# Altium PCB Fingerboardv4.PcbDoc
Units mil, origin at the board's own origin, x right, y up, seen from the top; angles counter-clockwise.
Board outline 600 x 900 mil, 2 copper layers (Top Layer, Bottom Layer); 12 components, 14 nets, 70 pads, 17 vias.
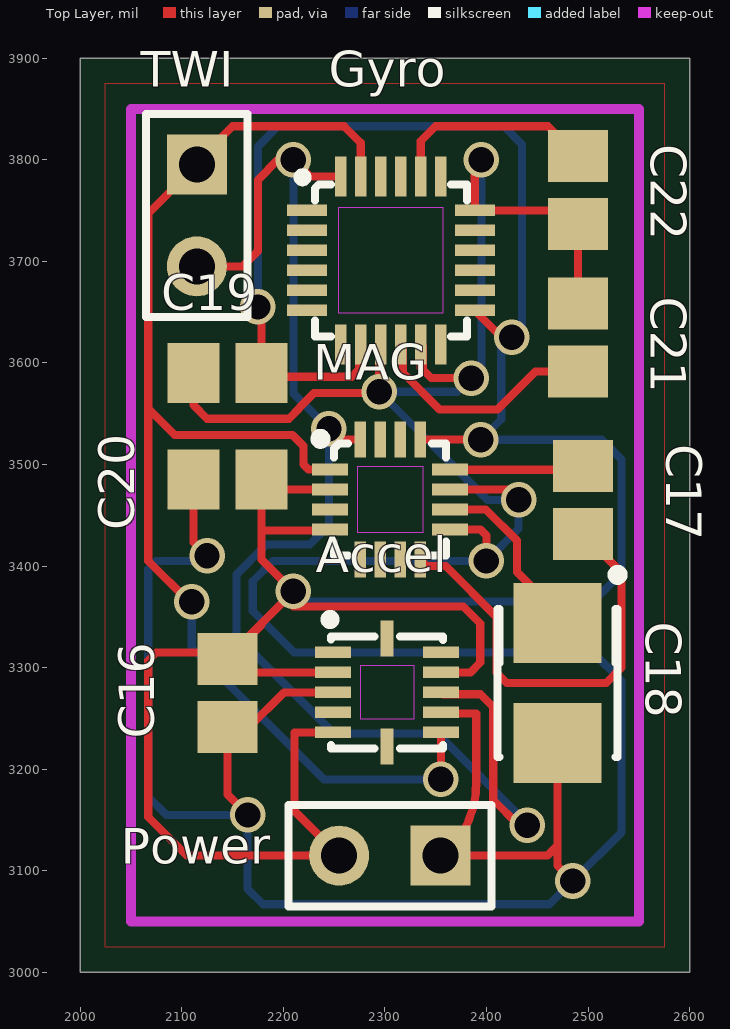
[diagram p0: Top Layer view]
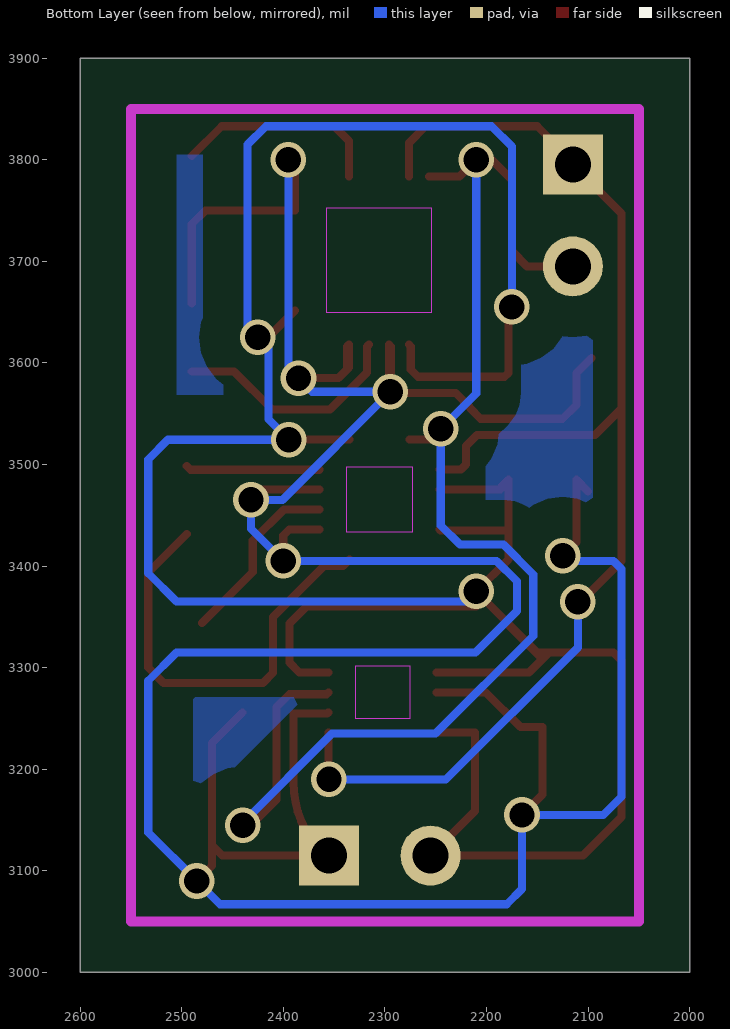
[diagram p1: Bottom Layer view, seen from below]

## Layer stack, top to bottom
Top Layer: signal copper 1.4
Dielectric: dielectric 12.6, FR-4, Dk 4.8
Bottom Layer: signal copper 1.4

## Board outline
2000,3000 2600,3000 2600,3900 2000,3900

## Design rules (kind name [scope] priority, off if disabled: settings)
Clearance "Polygon Clearance" [InPolygon] p1: gap=40
Clearance [All] p2: gap=8.1
HoleSize [All] p1: absolutevalues=TRUE maxlimit=100 minlimit=24 maxpercent=80.000 minpercent=20.000
PolygonConnect [All] p1: connectstyle=Relief reliefconductorwidth=10 reliefentries=4 polygonreliefangle="90 Angle"
RoutingVias [All] p1: holewidth=25 width=35 viastyle="Through Hole" minholewidth=25 minwidth=35 maxholewidth=25 maxwidth=35
SilkscreenOverComponentPads [All] p1: minsilkscreentomaskgap=10
SolderMaskExpansion [All] p1: expansion=4
Width [All] p1: maxlimit=50 minlimit=8 preferedwidth=8
26 further rules are at their usual default settings.

## Classes and differential pairs
net class TWI[1..0]: TWI0 TWI1
net class AUX_TWI[1..0]: AUX_TWI0 AUX_TWI1
component class U_IMU3000: C19 C20 C21 C22 Gyro
component class U_HMC5883L: C17 C18 MAG
component class U_BMA180: Accel C16
component class Fingerboard: Power TWI

## Components (designator, comment, footprint, x,y, rotation, side; value= is the part's Value field where it differs from the comment)
Accel "BMA180" "BMA180 - ECESHOP" 2255,3315 r270 top
C16 "Cap Semi" CAPC2012N 2145,3275 r90 top
C17 "Cap Semi" CAPC2012N 2495,3465 r90 top
C18 "Cap Pol1" TC3528-1411 2470,3285 r270 top
C19 "Cap Semi" CAPC2012N 2145,3590 r0 top
C20 "Cap Semi" CAPC2012N 2145,3485 r0 top
C21 "Cap Semi" CAPC2012N 2490,3625 r270 top
C22 "Cap Semi" CAPC2012N 2490,3770 r90 top
Gyro "IMU3000" "IMU3000 - ECESHOP" 2235,3750 r0 top
MAG "HMC5883L" "HMC5883L - ECESHOP" 2255,3495 r0 top
Power "Header 2" HDR1X2 2355,3115 r180 top
TWI "TWI" HDR1X2 2115,3795 r270 top

## Footprints (in the part's own frame and the unit in brackets; to place one, negate y for a bottom-side part, rotate by r counter-clockwise, add the part's x,y. Pads: shape width x height; smd on the part's side, far side on the other; paste and mask are expansions set on the pad)
"BMA180 - ECESHOP" [mm] "BMA180 - ECESHOP"
  rect 0.29x0.9 smd: 1(0,-0.15) 2(0.5,-0.15) 3(1,-0.15) 4(1.5,-0.15) 5(2,-0.15) 7(2,2.55) 8(1.5,2.55) 9(1,2.55) 10(0.5,2.55) 11(0,2.55)
  rect 0.9x0.32 smd: 6(2.35,1.2) 12(-0.35,1.2)
  Keep-Out Layer region: 0.328,0.524 1.658,0.524 1.658,1.876 0.328,1.876
  silkscreen extent -0.91,-0.31 2.4,2.6
CAPC2012N [mm] "Chip Capacitor, Body 2.0x1.3mm, IPC Medium Density"
  rect 1.3x1.5 smd: 1(-0.85,0) 2(0.85,0)
  body extent -1.1,-0.72 1.1,0.72, height 1.1
HDR1X2 [mm] "Connector; Header; 2 Position"
  rect 1.5x1.5 hole 0.9: 1(0,0)
  round 1.5 hole 0.9: 2(2.54,0)
  silkscreen extent -1.27,-1.27 3.81,1.27
"HMC5883L - ECESHOP" [mm]
  rect 0.9x0.29 smd: 1(-0.225,0) 2(-0.225,-0.5) 3(-0.225,-1) 4(-0.225,-1.5) 9(2.775,-1.5) 10(2.775,-1) 11(2.775,-0.5) 12(2.775,0)
  rect 0.29x0.9 smd: 5(0.525,-2.25) 6(1.025,-2.25) 7(1.525,-2.25) 8(2.025,-2.25) 13(2.025,0.75) 14(1.525,0.75) 15(1.025,0.75) 16(0.525,0.75)
  Keep-Out Layer region: 0.452,-1.572 2.099,-1.572 2.099,0.075 0.452,0.075
  silkscreen extent -0.57,-2.15 2.67,0.87
"IMU3000 - ECESHOP" [mm]
  rect 1x0.29 smd: 1(-0.3,0) 2(-0.3,-0.5) 3(-0.3,-1) 4(-0.3,-1.5) 5(-0.3,-2) 6(-0.3,-2.5) 13(3.9,-2.5) 14(3.9,-2) 15(3.9,-1.5) 16(3.9,-1) 17(3.9,-0.5) 18(3.9,0)
  rect 0.29x1 smd: 7(0.55,-3.35) 8(1.05,-3.35) 9(1.55,-3.35) 10(2.05,-3.35) 11(2.55,-3.35) 12(3.05,-3.35) 19(3.05,0.85) 20(2.55,0.85) 21(2.05,0.85) 22(1.55,0.85) 23(1.05,0.85) 24(0.55,0.85)
  Keep-Out Layer region: 0.488,-2.562 3.109,-2.562 3.109,0.066 0.488,0.066
  silkscreen extent -0.48,-3.15 3.7,0.9
TC3528-1411 [mm] "Capacitor, SM Tantalum; Body 3.5 x 2.8 mm (LxW typ)"
  rect 2x2.2 smd: 1(-1.5,0) 2(1.5,0)
  silkscreen extent -2.82,-1.5 1.85,1.63

## Part data
C16 C17 C19 C20 C21 C22: "Capacitor (Semiconductor SIM Model)"
C18: "Polarized Capacitor (Radial)"
Power: "Header, 2-Pin"
TWI: library part "Header 2", "Header, 2-Pin"

## Via types
v1: diameter 35, hole 25, Top Layer to Bottom Layer, 17 vias

## Nets (pads, with @x,y where several pads share a name; then routed paths per layer and width w, separated by ;. In a path a pad name is that pad's centre, name@x,y a point inside that pad or via, vN(x,y) a via of type N, cw(c..) or ccw(c..) an arc to the next point about the centre after c; other vN are vias at no path point)
3.3VCC: Accel.2 Accel.5 Accel.10 C16.2 C19.2 C20.2 Gyro.8 Gyro.13 MAG.2 MAG.4 MAG.13 Power.2 | length 3043.4
  Top Layer w8: v1(2175,3655) 2178.46,3655 C19.2 2182.14,3586.33 2267.37,3586.33 2274.46,3593.41 2274.46,3616.23 Gyro.8 ; 2178.46,3341.93 C16.2 ; Power.2@2235,3115 2105,3115 2067.1,3152.9 2067.1,3307.1 2075,3315 C16.2@2138.46,3315 ; MAG.4 2245.2,3435 2178.46,3435 ; MAG.2 2186.27,3475.32 2186.27,3477.19 C20.2 2178.46,3435 ; Accel.5 2211.26,3236.26 2211.26,3158.74 Power.2 ; Accel.2 2158.15,3295.32 C16.2 ; MAG.13 2394.35,3524.53 v1(2394.52,3524.36) ; Accel.10 2384.22,3295.32 2393.9,3305 2393.9,3343.33 2377.23,3360 2210,3360 v1(2210,3375) ; Gyro.13 2415.12,3625 v1(2425,3625) ; C16.2@2138.46,3315 2150,3315 v1(2210,3375) ; C16.2@2138.46,3315 C16.2 ; 2178.46,3435 2178.46,3406.54 v1(2210,3375)
  Bottom Layer w8: v1(2175,3655) 2175,3812.9 2195,3832.9 2417.1,3832.9 2435,3815 2435,3635 v1(2425,3625) 2414.6,3614.6 2414.6,3544.43 v1(2394.52,3524.36) 2513.54,3524.36 2532.9,3505 2532.9,3392.9 2505,3365 v1@2205,3365
AUX_TWI0: Gyro.7
AUX_TWI1: Gyro.6
GND: Accel.3 Accel.8 C16.1 C18.2 C19.1 C20.1 C21.1 C22.1 Gyro.9 Gyro.11 Gyro.18 MAG.9 MAG.11 Power.1 | length 3847
  Top Layer w8: C19.1@2096.7,3604.84 C19.1 2111.54,3558.46 2125,3545 2205.69,3545 2216.16,3555.46 2216.16,3556.16 2230.23,3570.23 2293.13,3570.23 v1(2294.48,3571.57) 2296.02,3573.11 Gyro.9 2294.15,3616.23 2294.15,3590.33 ; C20.1@2100,3473.46 C20.1 2111.54,3423.46 v1(2125,3410) ; v1(2165,3155) 2145,3175 C16.1 2166.54,3241.54 2200.63,3275.63 Accel.3 ; Power.1 Power.1@2359.06,3115 ; Accel.8 ccw(c2357.68,3258.23) 2357.68,3255 2390,3255 2390,3187.37 cw(c2290,3187.37) 2360.71,3116.66 Power.1@2359.06,3115 ; MAG.9 2394.05,3435.95 2400,3430 v1(2400,3405) ; MAG.11 2419.68,3475.32 2429.84,3465.16 v1(2431.7,3465.16) ; v1(2385,3585) 2345.68,3585 2337.27,3593.41 ; v1(2395,3800) 2388.54,3793.54 Gyro.18 2476.54,3750 C22.1 C21.1 ; C18.2@2440,3255.95 C18.2 2470,3125 ; v1(2485,3090) 2470,3105 2470,3125 ; 2337.27,3593.41 2335.39,3595.29 Gyro.11 2337.27,3616.23 2337.27,3593.41 ; Power.1@2359.06,3115 2460,3115 2470,3125
  Bottom Layer w8: v1(2125,3410) 2120,3405 2075,3405 2067.1,3397.1 2067.1,3172.9 2085,3155 v1(2165,3155) 2165,3082.1 2180,3067.1 2462.1,3067.1 v1(2485,3090) 2532.9,3137.9 2532.9,3287.1 2505,3315 2210.8,3315 2170,3355.8 2170,3385 2190,3405 v1(2400,3405) 2431.7,3436.7 v1(2431.7,3465.16) 2400.9,3465.16 v1(2294.48,3571.57) 2371.57,3571.57 v1(2385,3585) 2395,3595 v1(2395,3800)
NetAccel_4: Accel.4
NetC17_1: C17.1 MAG.8 | length 434.1
  Top Layer w8: MAG.8 2341.14,3400 2360,3400 2410,3350 2410,3295 2420,3285 2517.9,3285 2532.9,3300 2532.9,3393.64 C17.1
NetC17_2: C17.2 MAG.12 | length 132.4
  Top Layer w8: MAG.12 2364.49,3494.76 2491.29,3494.76 C17.2
NetC18_1: C18.1 MAG.10 | length 180.1
  Top Layer w8: MAG.10 2399.37,3455.63 2430,3425 2430,3394.06 C18.1@2480,3344.06
NetC21_2: C21.2 Gyro.10 | length 231.6
  Top Layer w8: Gyro.10 2317.58,3616.23 2317.58,3590.33 2353.96,3553.96 2410.82,3553.96 2448.4,3591.54 C21.2
NetC22_2: C22.2 Gyro.20 | length 207.7
  Top Layer w8: Gyro.20 2335.39,3818.29 2350,3832.9 2460.56,3832.9 C22.2
NetGyro_12: Gyro.12
NetINT_3: MAG.15
TWI0: Accel.7 Gyro.23 MAG.1 TWI.1 | length 1292.7
  Top Layer w8: v1(2110,3365) 2107.1,3365 2067.1,3405 2067.1,3555 ; MAG.1 2225,3495 2220,3500 2220,3518.14 2209.24,3528.9 2093.2,3528.9 2067.1,3555 ; Gyro.23 2276.34,3816.56 2260,3832.9 2150,3832.9 2115,3797.9 TWI.1 2067.1,3747.1 2067.1,3555 ; v1(2355,3190) 2355.39,3190.39 Accel.7
  Bottom Layer w8: v1(2110,3365) 2110,3320 2240,3190 v1(2355,3190)
TWI1: Accel.9 Gyro.24 MAG.16 TWI.2 | length 1370.6
  Top Layer w8: TWI.2 2160,3695 2175,3710 2175,3780 2195,3800 v1(2210,3800) 2226.54,3783.46 Gyro.24 ; v1(2245,3535) 2255.47,3524.53 MAG.16 ; Accel.9 2357.27,3273.75 2394.02,3273.75 2406.66,3261.11 2406.66,3170 2431.66,3145 v1(2440,3145)
  Bottom Layer w8: v1(2210,3800) 2210,3570 v1(2245,3535) 2245,3440 2226.1,3421.1 2183.33,3421.1 2153.9,3391.67 2153.9,3331.1 2250,3235 2351.86,3235 2440,3146.86 v1(2440,3145)
pads on no net: Accel.1 Accel.6 Accel.11 Accel.12 Gyro.1 Gyro.2 Gyro.3 Gyro.4 Gyro.5 Gyro.14 Gyro.15 Gyro.16 Gyro.17 Gyro.19 Gyro.21 Gyro.22 MAG.3 MAG.5 MAG.6 MAG.7 MAG.14

## Polygon pours and split planes (outlines as drawn)
GND on Top Layer "Top Layer-GND" (solid, pour order 5): 2025,3875 2575,3875 2575,3025 2025,3025
GND on Bottom Layer "bottom" (solid, pour order 2): 2025,3875 2575,3875 2575,3025 2025,3025

## Keep-outs
Keep-Out Layer:
  lines w10: 2050,3050 2050,3850 2550,3850 2550,3050 2050,3050

## Dimensions
2050,3050 to 2050,3850 on Mechanical 1
2050,3050 to 2550,3050 on Mechanical 1